# Altium PCB main-module-60mmPIC.PcbDoc (part 1 of 2)
Units mm, origin at the board's own origin, x right, y up, seen from the top; angles counter-clockwise.
Board outline 60 x 60 mm, 2 copper layers (Top Layer, Bottom Layer), stack 1.591 mm thick; 103 components, 103 nets, 469 pads, 239 vias.
Unrouted connection lines stored in the file: 40.
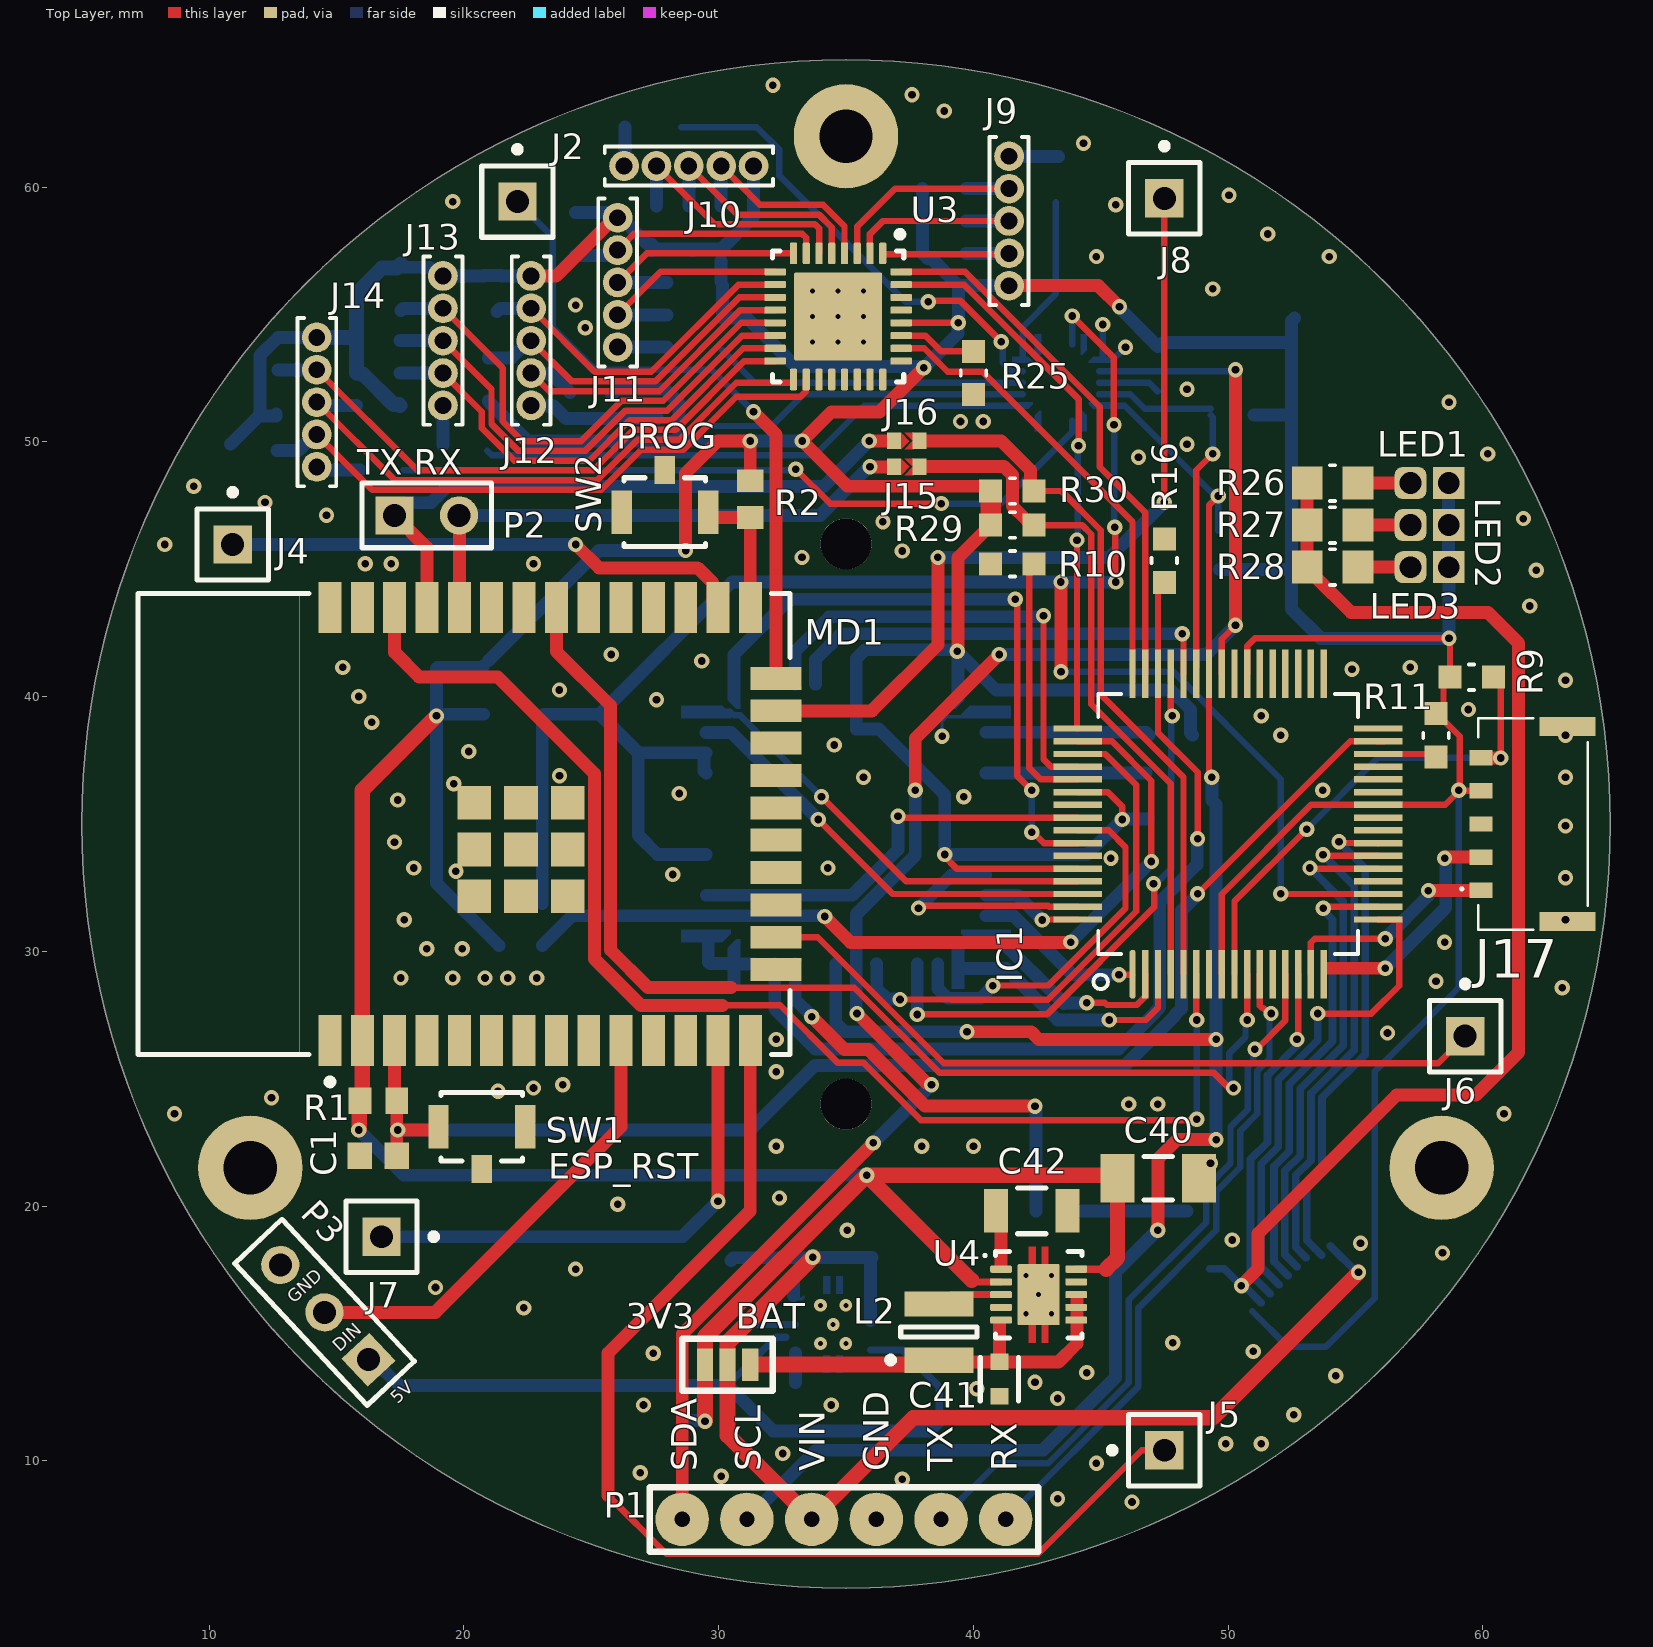
[diagram p0: Top Layer view]
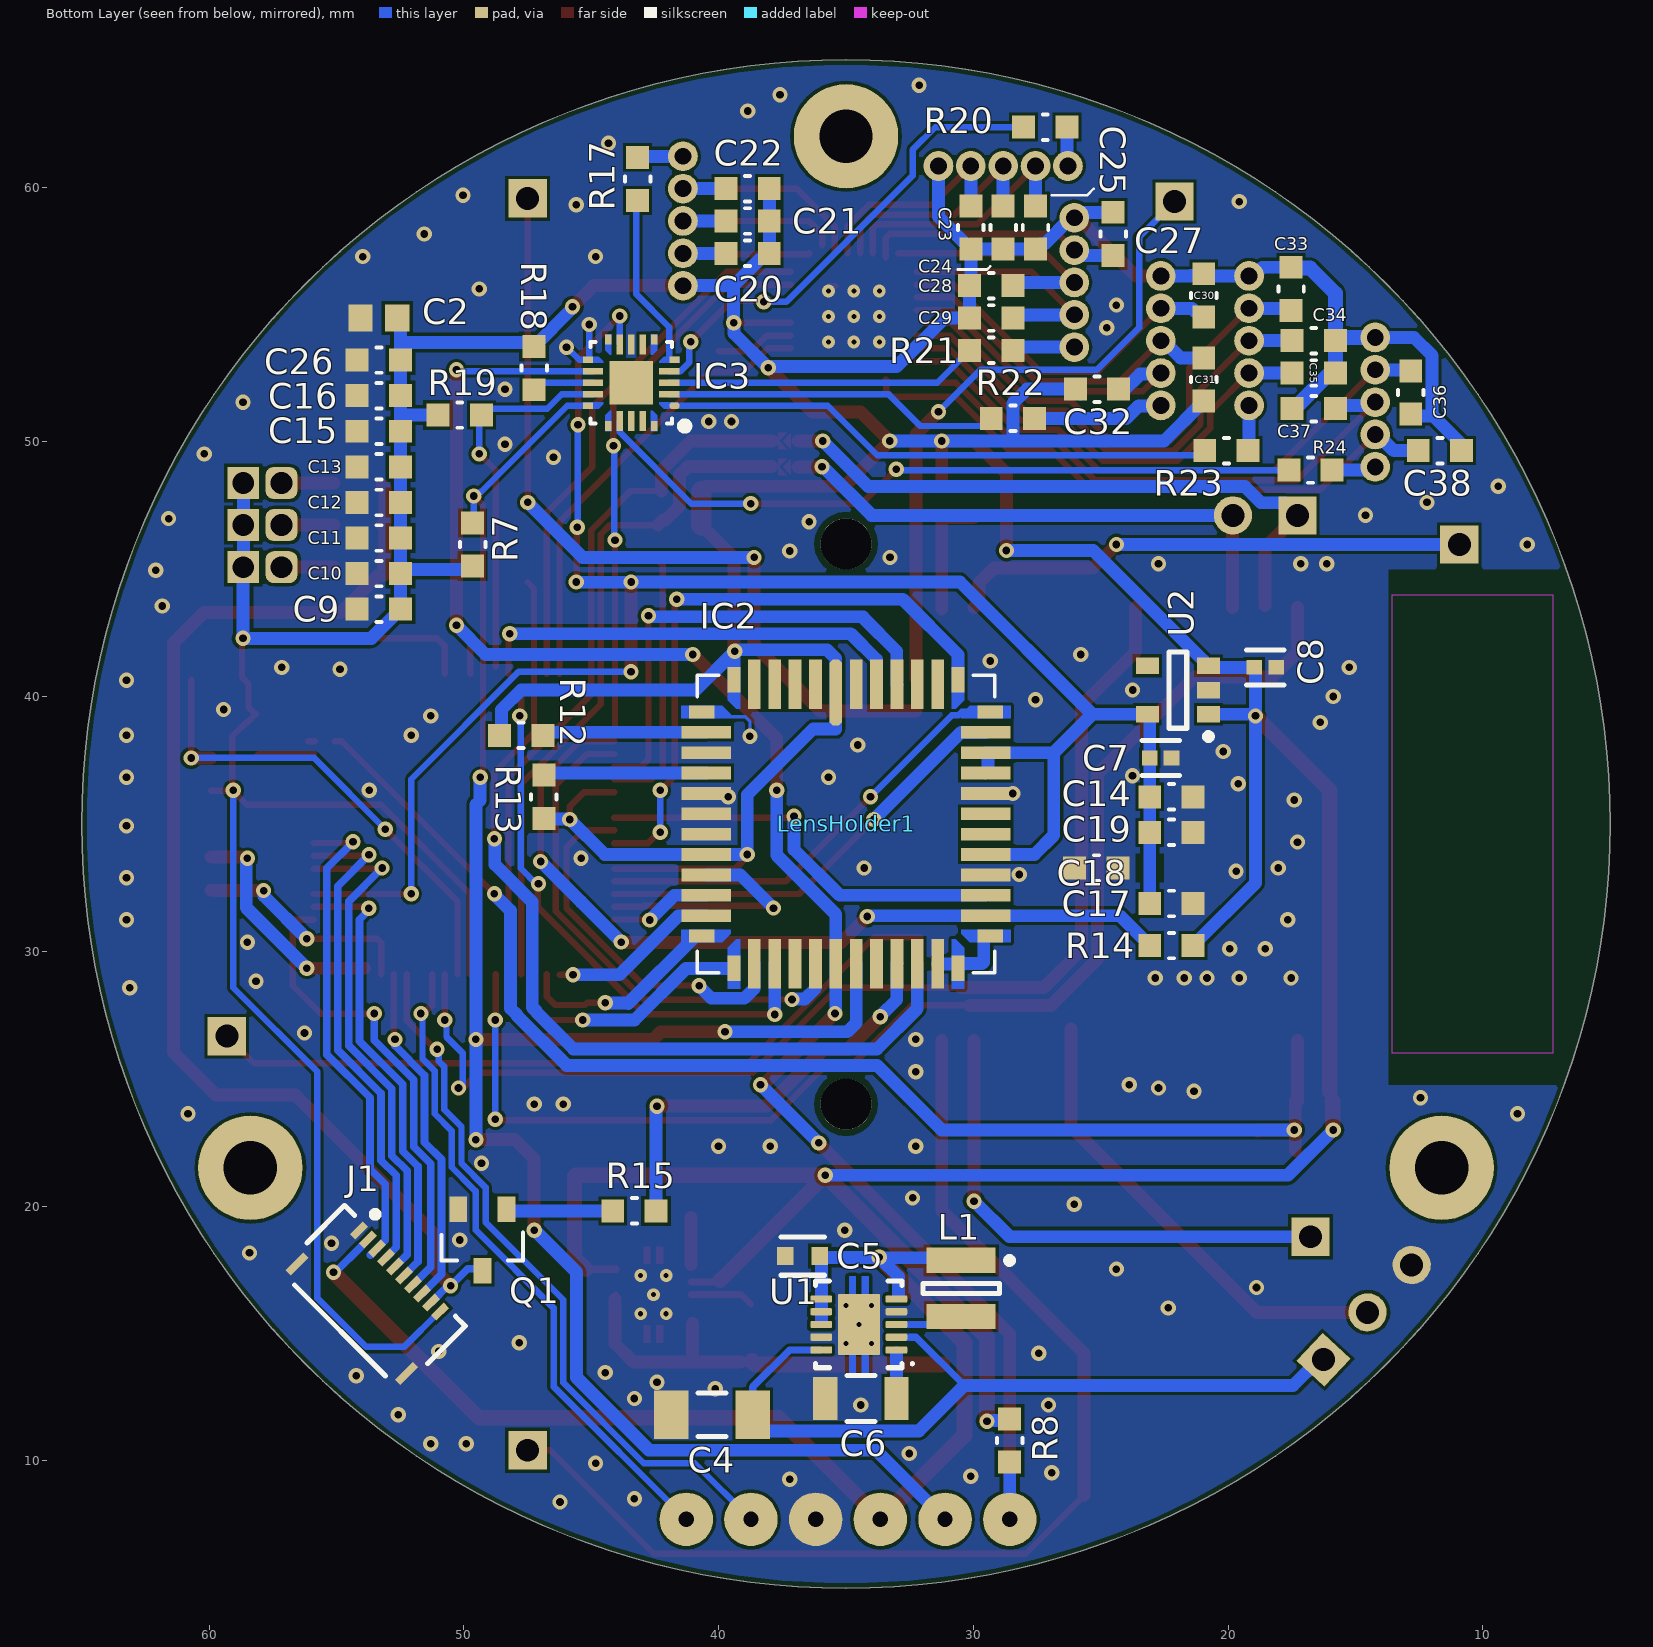
[diagram p1: Bottom Layer view, seen from below]

## Layer stack, top to bottom
Top Solder: solder mask 0.0102, Solder Resist, Dk 3.5
Top Layer: signal copper 0.0356
Dielectric 1: dielectric 1.52, FR-4, Dk 4.8
Bottom Layer: signal copper 0.0356
Bottom Solder: solder mask 0.0102, Solder Resist, Dk 3.5

## Board outline
35,5 cw(c35,35) 5,35 cw(c35,35) 35,65 cw(c35,35) 65,35 cw(c35,35)

## Design rules (kind name [scope] priority, off if disabled: settings)
BoardOutlineClearance [All] p1: gap=0.2 ignorepadtopadclearanceinfootprint=FALSE
Clearance [All] p1: gap=0.127 ignorepadtopadclearanceinfootprint=FALSE except(0.25: Arc-Hole Track-Hole SMDPad-Hole THPad-Hole Via-Hole Fill-Hole Poly-Hole Region-Hole Text-Hole)
ComponentClearance [All] p1: gap=0.127 collisioncheckmode=3 verticalgap=0.127 showdistances=TRUE
DiffPairsRouting [All] p1: maxlimit=0.254 minlimit=0.127 mostfreqgap=0.127 toplayer_minwidth=0.127 toplayer_maxwidth=25.4 toplayer_prefwidth=0.127 bottomlayer_minwidth=0.127 bottomlayer_maxwidth=25.4 bottomlayer_prefwidth=0.127 maxuncoupledlength=12.7
Height [All] p1: minheight=0 maxheight=1816.048 prefheight=12.7
HoleSize [All] p1: absolutevalues=TRUE maxlimit=6.3 minlimit=0.3 maxpercent=80.000 minpercent=20.000
HoleToHoleClearance [All] p1: gap=0.25 allowstackedmicrovias=FALSE
MinimumAnnularRing [All] p1: minimumring=0.076
MinimumSolderMaskSliver [All] p1: minsoldermaskwidth=0
PlaneClearance [All] p1: clearance=0.127
PlaneConnect PlaneConnectPowerPads [InPadClass('PowerPads')] p1: planeconnectstyle=Direct reliefexpansion=0.508 reliefentries=4 reliefconductorwidth=0.254 reliefairgap=0.254
PlaneConnect [All] p2: planeconnectstyle=Direct reliefexpansion=0.3 reliefentries=4 reliefconductorwidth=0.127 reliefairgap=0.127
PolygonConnect PolygonConnectPowerPads [All vs (InPadClass('PowerPads'))] p1: connectstyle=Direct reliefconductorwidth=0.254 reliefentries=4 polygonreliefangle="90 Angle" airgapwidth=0.254
PolygonConnect [All] p2: connectstyle=Direct reliefconductorwidth=0.254 reliefentries=4 polygonreliefangle="90 Angle" airgapwidth=0.127
RoutingVias [All] p1: holewidth=0.3 width=0.6 viastyle="Through Hole" minholewidth=0.3 minwidth=0.6 maxholewidth=0.6 maxwidth=6.6
RoutingVias RoutingVias_1 [All] p2: holewidth=0.3 width=0.6 viastyle="Through Hole" minholewidth=0.3 minwidth=1.27 maxholewidth=0.711 maxwidth=1.27
SilkToSilkClearance [All] p1: silktosilkclearance=0
SilkToSolderMaskClearance [IsPad] p1: minsilkscreentomaskgap=0.127 clearancetoexposedcopper=TRUE
SolderMaskExpansion [All] p1: expansion=0.075 istentingtop=FALSE
Width [All] p1: maxlimit=25.4 minlimit=0.127 preferedwidth=0.127 minimp=50.000000 maximp=50.000000 favimp=50.000000
20 further rules are at their usual default settings.

## Classes and differential pairs
net class PIXEL_D[0..7]: PIXEL_D0 PIXEL_D1 PIXEL_D2 PIXEL_D3 PIXEL_D4 PIXEL_D5 PIXEL_D6 PIXEL_D7
component class "U_main UI": C19 C20 C21 C22 C23 C24 C25 C26 C27 C28 C29 C30 C31 C32 C33 C34 C35 C36 C37 C38 C? IC3 IC? J9 J10 J11 J12 J13 J14 LED? R17 R18 R19 R20 R21 R22 R23 R24 R25 R? U3
component class interconnect: J1 J15 J16 P1 R29 R30
component class power: BAT C4 C5 C6 C7 C8 C40 C41 C42 L1 L2 RG1 RG2 U1 U2 U4
component class U_optics: C15 C16 C17 C18 IC2 LED1 LED2 LED3 Q1 R12 R13 R14 R15 R16 R26 R27 R28
component class MCU: C9 C10 C11 C12 C13 C14 IC1 J17 R7 R8 R9 R10 R11
component class ESP32: C1 C2 J2 J4 J5 J6 J8 MD1 P2 P3 R1 R2 RG1 RG2 SW1 SW2

## Components (designator, comment, footprint, x,y, rotation, side; value= is the part's Value field where it differs from the comment)
BAT "SJUMPER3POS" SJUMPER3POS-Footprint-1 30.353,13.774 r0 top (schematic designator SJ1)
C1 "GRM1885C1H101JA01D" CAPC1608X90X35ML10T15 16.637,21.971 r0 top
C2 "GRM1885C1H101JA01D" CAPC1608X90X35ML10T15 53.34,54.864 r180 bottom
C4 "CAP 22uF 6.3V 1206(3216)" CAPC1206(3216)190_M 40.259,11.811 r180 bottom value=22uF
C5 "GRM188R60J106ME47D" FP-GRM188-0_1-e0_2_0_55-MFG 36.703,18.034 r0 bottom
C6 "C1206C104K1RACTU" FP-C1206C-EB-MFG 34.417,12.446 r0 bottom value="0.10 £gF"
C7 "GRM155R60J475ME47D" FP-GRM155-0_1-IPC_B 22.65,37.592 r180 bottom
C8 "GRM155R60J475ME47D" FP-GRM155-0_1-IPC_B 18.542,41.148 r180 bottom
C9 "0.1uF" 1608[0603]_M 53.34,43.434 r180 bottom
C10 "0.1uF" 1608[0603]_M 53.34,44.831 r180 bottom
C11 "0.1uF" 1608[0603]_M 53.34,46.228 r180 bottom
C12 "0.1uF" 1608[0603]_M 53.34,47.625 r180 bottom
C13 "0.1uF" 1608[0603]_M 53.34,49.022 r180 bottom
C14 "0.1uF" 1608[0603]_M 22.225,36.068 r0 bottom
C15 "0.1uF" 1608[0603]_M 53.34,50.419 r180 bottom
C16 "0.1uF" 1608[0603]_M 53.34,51.816 r180 bottom
C17 "0.1uF" 1608[0603]_M 22.225,31.877 r0 bottom
C18 "0.1uF" 1608[0603]_M 25.173,33.274 r0 bottom
C19 "0.1uF" 1608[0603]_M 22.225,34.671 r0 bottom
C20 "10nF" 1608[0603]_M 38.862,57.404 r180 bottom
C21 "10nF" 1608[0603]_M 38.862,58.674 r180 bottom
C22 "10nF" 1608[0603]_M 38.862,59.944 r180 bottom
C23 "10nF" 1608[0603]_M 30.099,58.42 r270 bottom
C24 "10nF" 1608[0603]_M 28.829,58.42 r270 bottom
C25 "10nF" 1608[0603]_M 27.559,58.42 r270 bottom
C26 "0.1uF" 1608[0603]_M 53.34,53.213 r180 bottom
C27 "10nF" 1608[0603]_M 24.511,58.166 r90 bottom
C28 "10nF" 1608[0603]_M 29.299,56.134 r0 bottom
C29 "10nF" 1608[0603]_M 29.299,54.864 r0 bottom
C30 "10nF" 1608[0603]_M 20.955,55.753 r90 bottom
C31 "10nF" 1608[0603]_M 20.955,52.451 r270 bottom
C32 "10nF" 1608[0603]_M 25.146,52.07 r0 bottom
C33 "10nF" 1608[0603]_M 17.526,56.007 r90 bottom
C34 "10nF" 1608[0603]_M 16.637,53.975 r180 bottom
C35 "10nF" 1608[0603]_M 16.637,52.705 r180 bottom
C36 "10nF" 1608[0603]_M 12.827,51.943 r270 bottom
C37 "10nF" 1608[0603]_M 16.637,51.308 r0 bottom
C38 "10nF" 1608[0603]_M 11.684,49.657 r180 bottom
C40 "CAP 22uF 6.3V 1206(3216)" CAPC1206(3216)190_M 47.261,21.093 r180 top value=22uF
C41 "GRM188R60J106ME47D" FP-GRM188-0_1-e0_2_0_55-MFG 41.021,13.208 r270 top
C42 "C1206C104K1RACTU" FP-C1206C-EB-MFG 42.291,19.812 r0 top value="0.10 £gF"
IC1 "PIC32MZ1024ECG064" TQFP-64_M 50,35 r90 top locked
IC2 "MT9V034C12STM" CLCC-48_m 35,35 r180 bottom locked
IC3 "AT42QT1070-MMH" VQFN-20-EXPOSED-PAD_M 43.434,52.324 r180 bottom
J1 "503480-1000" MOLX-503480-1000 53.467,16.51 r225 bottom
J2 "Socket" PIN1 22.098,59.436 r0 top
J4 "Socket" PIN1 10.922,45.974 r0 top
J5 "Socket" PIN1 47.498,10.414 r90 top
J6 "Socket" PIN1 59.309,26.67 r0 top
J7 "Socket" PIN1 16.764,18.796 r270 top
J8 "Socket" PIN1 47.498,59.563 r0 top
J9 "GRPB051VWVN-RC" CONN5_1VWVN-RC_SUL 41.402,61.214 r270 top
J10 "GRPB051VWVN-RC" CONN5_1VWVN-RC_SUL 26.289,60.833 r0 top
J11 "GRPB051VWVN-RC" CONN5_1VWVN-RC_SUL 26.035,53.721 r90 top
J12 "GRPB051VWVN-RC" CONN5_1VWVN-RC_SUL 22.639,51.435 r90 top
J13 "GRPB051VWVN-RC" CONN5_1VWVN-RC_SUL 19.177,51.435 r90 top
J14 "GRPB051VWVN-RC" CONN5_1VWVN-RC_SUL 14.224,49.022 r90 top
J15 "JUMPER" JUMPER 37.338,49.022 r270 top
J16 "JUMPER" JUMPER 37.338,50.038 r270 top
J17 "BM05B-ADHKS-GAN-ETB" BM05BADHKSGANETB 61.976,35 r90 top
L1 "SRN3015-4R7M" BOUR-SRN3015-2_V 30.48,16.764 r270 bottom
L2 "SRN3015-4R7M" BOUR-SRN3015-2_V 38.65,15.055 r90 top
LED1 "Unpopulated" CABLE-TERMINAL1x2 57.912,48.387 r180 top
LED2 "Unpopulated" CABLE-TERMINAL1x2 57.912,46.736 r180 top
LED3 "Unpopulated" CABLE-TERMINAL1x2 57.912,45.085 r180 top
LensHolder1 "Unpopulated" BOARDLENSMOUNT_M12_22MM 35,35 r90 bottom locked
MD1 "ESP32-WROOM-32" FP-ESP32-WROOM-32-MFG 20,35 r90 top locked
P1 "811-S1-006-30-015101" "New footprint 1" 34.92,7.7 r0 top
P2 "Header 2" HDR1X2 17.272,47.117 r0 top
P3 "LED_strip" HDR1X3 16.256,13.97 r133 top
Q1 "BSS138BK" SOT23-3_N 49.276,18.669 r270 bottom
R1 "ERJ-3EKF1001V" RESC1608X55X30ML15T15 16.637,24.13 r180 top
R2 "ERJ-3EKF1001V" RESC1608X55X30ML15T15 31.242,47.752 r90 top
R7 "1K5" 1608[0603]_M 49.657,45.974 r270 bottom
R8 "1K5" 1608[0603]_M 28.575,10.795 r90 bottom
R9 "10K" 1608[0603]_M 59.563,40.767 r180 top
R10 "Unpopulated" 1608[0603]_M 41.529,45.212 r0 top
R11 "10K" 1608[0603]_M 58.166,38.481 r90 top
R12 "1K" 1608[0603]_M 47.752,38.481 r0 bottom
R13 "1K" 1608[0603]_M 46.863,36.068 r270 bottom
R14 "10K" 1608[0603]_M 22.225,30.226 r180 bottom
R15 "330" 1608[0603]_M 43.307,19.812 r0 bottom
R16 "10K" 1608[0603]_M 47.498,45.339 r270 top
R17 "4K7" 1608[0603]_M 43.18,60.325 r270 bottom
R18 "47K" 1608[0603]_M 47.244,52.899 r90 bottom
R19 "47K" 1608[0603]_M 50.165,51.054 r0 bottom
R20 "4K7" 1608[0603]_M 27.178,62.357 r0 bottom
R21 "4K7" 1608[0603]_M 29.299,53.594 r0 bottom
R22 "4K7" 1608[0603]_M 28.448,50.927 r0 bottom
R23 "4K7" 1608[0603]_M 20.066,49.657 r0 bottom
R24 "4K7" 1608[0603]_M 16.764,48.895 r0 bottom
R25 "4K99" 1608[0603]_M 40.005,52.705 r90 top
R26 "26R1, 0.1%, 1/8W" 2012[0805]_M 54.102,48.387 r0 top
R27 "26R1, 0.1%, 1/8W" 2012[0805]_M 54.102,46.736 r0 top
R28 "26R1, 0.1%, 1/8W" 2012[0805]_M 54.102,45.085 r0 top
R29 "10K" 1608[0603]_M 41.529,46.736 r180 top
R30 "10K" 1608[0603]_M 41.529,48.075 r180 top
SW1 "B3U-1100P" FP-B3U-1100P-MFG 20.701,23.114 r0 top
SW2 "B3U-1100P" FP-B3U-1100P-MFG 27.891,47.244 r180 top
U1 "TPS61202DRCT" DRC0010J_V 34.495,15.351 r0 bottom
U2 "LP2980AIM5-3.3/NOPB" MF05A_L 21.971,40.259 r0 bottom
U3 "TLC5947RHBT" RHB0032E_V 34.691,54.926 r270 top
U4 "TPS61201DRCT" DRC0010J_V 42.562,16.521 r0 top

## Footprints (in the part's own frame and the unit in brackets; to place one, negate y for a bottom-side part, rotate by r counter-clockwise, add the part's x,y. Pads: shape width x height; smd on the part's side, far side on the other; paste and mask are expansions set on the pad)
1608[0603]_M [mm] "Two Terminal Package, Body 1.6x0.8mm, IPC Low Density"
  rect 0.9x0.9 smd: 1(-0.85,0) 2(0.85,0)
  silkscreen extent -0.1,-0.5 0.1,0.5, body extent -0.8,-0.4 0.8,0.4, height 0.85
2012[0805]_M [mm] "Two Terminal Package, Body 2x1.2mm, IPC Low Density"
  rect 1.2x1.3 smd: 1(-1,0) 2(1,0)
  silkscreen extent -0.1,-0.7 0.1,0.7, body extent -1,-0.6 1,0.6, height 1.3
BM05BADHKSGANETB [mm]
  rect 0.6x0.9 smd: 1(-2.6,2.05) 2(-1.3,2.05) 3(0,2.05) 4(1.3,2.05) 5(2.6,2.05)
  rect 0.75x2.2 smd: MP1(-3.825,-1.35) MP2(3.825,-1.35)
  silkscreen extent -4.15,-2.15 4.15,2.85, body extent -4.15,-2.37 4.15,2.44, height 2
BOARDLENSMOUNT_M12_22MM [mm] "M12 (S-Mount) board lens mount base, 22mm hole distance, 16mm height"
  round 2 hole 2 unplated: 0(-11,0) 1(11,0)
  body extent -13.25,-10.5 13.25,10.5, height 16
BOUR-SRN3015-2_V [mm] "SMD, 2-Leads, Body 3x3mm, Height 1.5mm"
  rect 1x2.7 smd: 1(-1.1,0) 2(1.1,0)
  silkscreen extent -1.22,-1.5 0.2,2.02, body extent -1.5,-1.5 1.5,1.5, height 1.5
CABLE-TERMINAL1x2 [mm] "Cable to board terminal, 1x2, 1.5mm pitch"
  rect 1.25x1.25 hole 0.85 mask+0.075: 1(-0.75,0)
  rrect50% 1.25x1.25 hole 0.85 mask+0.075: 2(0.75,0)
CAPC1206(3216)190_M [mm] "Chip Capacitor, Body 3.2x1.6mm, Height 1.9mm, IPC Low Density"
  rect 1.35x1.9 smd: 1(-1.6,0) 2(1.6,0)
  silkscreen extent -0.55,-0.85 0.55,0.85, body extent -1.7,-0.9 1.7,0.9, height 1.9
CAPC1608X90X35ML10T15 [mm] "Chip Capacitor, 2-Leads, Body 1.60x0.80mm, IPC Low Density"
  rect 0.95x1.05 smd: 1(-0.725,0) 2(0.725,0)
  body extent -0.85,-0.45 0.85,0.45, height 0.9
CLCC-48_m [mm] "CLCC, 48-Leads, Body 11.43x11.43x2.3mm, Pitch 0.8mm, IPC Low Density"
  oct 0.5x2.6 smd paste-0.025 mask+0.075: 1(-0.4,5.165)
  rect 0.5x1.95 smd paste-0.025 mask+0.075: 2(-1.2,5.49) 3(-2,5.49) 4(-2.8,5.49) 5(-3.6,5.49) 20(-3.6,-5.49) 21(-2.8,-5.49) 22(-2,-5.49) 23(-1.2,-5.49) 24(-0.4,-5.49) 25(0.4,-5.49) 26(1.2,-5.49) 27(2,-5.49) 28(2.8,-5.49) 29(3.6,-5.49) 44(3.6,5.49) 45(2.8,5.49) 46(2,5.49) 47(1.2,5.49) 48(0.4,5.49)
  rect 0.5x1 smd paste-0.025 mask+0.075: 6(-4.4,5.665) 19(-4.4,-5.665) 30(4.4,-5.665) 43(4.4,5.665)
  rect 1x0.5 smd paste-0.025 mask+0.075: 7(-5.665,4.4) 18(-5.665,-4.4) 31(5.665,-4.4) 42(5.665,4.4)
  rect 1.95x0.5 smd paste-0.025 mask+0.075: 8(-5.49,3.6) 9(-5.49,2.8) 10(-5.49,2) 11(-5.49,1.2) 12(-5.49,0.4) 13(-5.49,-0.4) 14(-5.49,-1.2) 15(-5.49,-2) 16(-5.49,-2.8) 17(-5.49,-3.6) 32(5.49,-3.6) 33(5.49,-2.8) 34(5.49,-2) 35(5.49,-1.2) 36(5.49,-0.4) 37(5.49,0.4) 38(5.49,1.2) 39(5.49,2) 40(5.49,2.8) 41(5.49,3.6)
  Top Layer region: 4.15,6.465 4.15,4.515 4.3,4.515 4.65,4.865 4.65,6.465
  Top Layer region: 6.465,4.155 4.515,4.15 4.515,4.3 4.865,4.65 6.465,4.65
  Top Layer region: 6.465,-4.15 4.515,-4.15 4.515,-4.3 4.865,-4.65 6.465,-4.65
  Top Layer region: 4.155,-6.465 4.15,-4.515 4.3,-4.515 4.65,-4.865 4.65,-6.465
  Top Layer region: -4.15,-6.465 -4.15,-4.515 -4.3,-4.515 -4.65,-4.865 -4.65,-6.465
  Top Layer region: -6.465,-4.155 -4.515,-4.15 -4.515,-4.3 -4.865,-4.65 -6.465,-4.65
  Top Layer region: -4.155,6.465 -4.15,4.515 -4.3,4.515 -4.65,4.865 -4.65,6.465
  Top Layer region: -6.465,4.15 -4.515,4.15 -4.515,4.3 -4.865,4.65 -6.465,4.65
  silkscreen extent -5.84,-5.84 5.84,5.84, body extent -5.72,-5.72 5.72,5.72, height 2.3
CONN5_1VWVN-RC_SUL [mil]
  round 46 hole 26 mask+0: 1(0,0) 2(50,0) 3(100,0) 4(150,0) 5(200,0)
  silkscreen extent -30,-30 230,30, body extent 0,0 10,10, height 10
DRC0010J_V [mm] "SON, 10-Leads, Body 3x3mm, Pitch 0.5mm, Thermal Pad 2.4x1.65mm, TI Recommended"
  rrect36% 0.85x0.28 smd paste-0.025 mask+0.07: 1(-1.475,1) 2(-1.475,0.5) 3(-1.475,0) 4(-1.475,-0.5) 5(-1.475,-1) 6(1.475,-1) 7(1.475,-0.5) 8(1.475,0) 9(1.475,0.5) 10(1.475,1)
  rrect6% 1.65x2.4 smd paste-0.825 mask+0.07: 11(0,0)
  Top Layer region: -0.39,-1.2 -0.11,-1.2 -0.11,-1.9 -0.39,-1.9
  Top Layer region: 0.39,-1.9 0.11,-1.9 0.11,-1.2 0.39,-1.2
  Top Layer region: 0.39,1.2 0.11,1.2 0.11,1.9 0.39,1.9
  Top Layer region: -0.39,1.9 -0.11,1.9 -0.11,1.2 -0.39,1.2
  silkscreen extent -2.15,-1.7 1.7,1.7, body extent -1.55,-1.55 1.55,1.55, height 1
FP-B3U-1100P-MFG [mm]
  rect 0.8x1.7 smd paste+0 mask+0: 1(1.7,0) 2(-1.7,0)
  rect 0.8x1.1 smd paste+0 mask+0: 3(0,-1.65)
  silkscreen extent -1.6,-1.35 1.6,1.35, body extent -2.2,-2.3 2.2,1.45, height 0.25
FP-C1206C-EB-MFG [mm]
  rect 0.95x1.7 smd paste+0 mask+0: 1(-1.4,0) 2(1.4,0)
  silkscreen extent -0.55,-0.9 0.55,0.9, body extent -1.6,-0.8 1.6,0.8, height 0.88
FP-ESP32-WROOM-32-MFG [mm]
  rect 2x0.9 smd paste+0 mask+0: 1(-8.5,5.26) 2(-8.5,3.99) 3(-8.5,2.72) 4(-8.5,1.45) 5(-8.5,0.18) 6(-8.5,-1.09) 7(-8.5,-2.36) 8(-8.5,-3.63) 9(-8.5,-4.9) 10(-8.5,-6.17) 11(-8.5,-7.44) 12(-8.5,-8.71) 13(-8.5,-9.98) 14(-8.5,-11.25) 25(8.5,-11.25) 26(8.5,-9.98) 27(8.5,-8.71) 28(8.5,-7.44) 29(8.5,-6.17) 30(8.5,-4.9) 31(8.5,-3.63) 32(8.5,-2.36) 33(8.5,-1.09) 34(8.5,0.18) 35(8.5,1.45) 36(8.5,2.72) 37(8.5,3.99) 38(8.5,5.26)
  rect 0.9x2 smd paste+0 mask+0: 15(-5.715,-12.25) 16(-4.445,-12.25) 17(-3.175,-12.25) 18(-1.905,-12.25) 19(-0.635,-12.25) 20(0.635,-12.25) 21(1.905,-12.25) 22(3.175,-12.25) 23(4.445,-12.25) 24(5.715,-12.25)
  rect 1.33x1.33 smd paste+0 mask+0: 39(0.835,-4.075) 39_1(-1,-4.075) 39_2(-2.835,-4.075) 39_3(0.835,-2.24) 39_4(-1,-2.24) 39_5(-2.835,-2.24) 39_6(0.835,-0.405) 39_7(-1,-0.405) 39_8(-2.835,-0.405)
  Keep-Out Layer region: -9,6.45 9,6.45 9,12.75 -9,12.75
  Keep-Out Layer region: -9,6.45 9,6.45 9,12.75 -9,12.75
  silkscreen extent -10.25,-12.8 9.05,12.8, body extent -9.6,-13.35 9.6,12.9, height 0.25
FP-GRM155-0_1-IPC_B [mm]
  rect 0.615x0.572 smd paste+0 mask+0: 1(-0.429,0) 2(0.429,0)
  silkscreen extent -0.74,-0.69 0.74,0.69, body extent -0.5,-0.25 0.5,0.25, height 0.6
FP-GRM188-0_1-e0_2_0_55-MFG [mm]
  rect 0.65x0.7 smd paste+0 mask+0: 1(-0.675,0) 2(0.675,0)
  silkscreen extent -0.85,-0.75 0.85,0.75, body extent -0.8,-0.4 0.8,0.4, height 0.9
HDR1X2 [mm] "Connector; Header; 2 Position"
  rect 1.5x1.5 hole 0.9: 1(0,0)
  round 1.5 hole 0.9: 2(2.54,0)
  silkscreen extent -1.27,-1.27 3.81,1.27
HDR1X3 [mm] "Connector; Header; 3 Position"
  rect 1.5x1.5 hole 0.9: 1(0,0)
  round 1.5 hole 0.9: 2(2.54,0) 3(5.08,0)
  silkscreen extent -1.27,-1.27 6.35,1.27
JUMPER [mm]
  rect 0.65x0.55 smd paste-2.54 mask-2.54: 1(0,-0.45) 2(0,0.55)
  Top Layer region: -0.325,-0.041 0,0.284 0.325,-0.041 0.325,0.318 -0.325,0.317
  Top Layer region: -0.325,-0.175 0.003,0.152 0.325,-0.175
MF05A_L [mm] "SOT23, 5-Leads, Body 2.9x1.6mm, Pitch 0.95mm, Lead Span 2.8mm, IPC High Density"
  rect 0.9x0.65 smd: 1(-1.2,0.95) 2(-1.2,0) 3(-1.2,-0.95) 4(1.2,-0.95) 5(1.2,0.95)
  silkscreen extent -1.32,-1.5 0.35,1.95, body extent -0.83,-1.49 0.83,1.5, height 1.19
MOLX-503480-1000 [mm] "FPC Connector, 10-Leads, Right Angle, Pitch 0.5 mm, Mated Height 1.0 mm, SMT"
  rect 0.3x0.7 smd: 1(-2.25,1.325) 2(-1.75,1.325) 3(-1.25,1.325) 4(-0.75,1.325) 5(-0.25,1.325) 6(0.25,1.325) 7(0.75,1.325) 8(1.25,1.325) 9(1.75,1.325) 10(2.25,1.325)
  rect 0.3x1 smd: MP1(-3.04,-1.325) MP2(3.04,-1.325)
  silkscreen extent -3.35,-1.98 3.35,2.35, body extent -3.35,-1.98 3.35,1.62, height 1.91
"New footprint 1" [mm]
  round 2.1 hole 0.6: 1(-6.35,0) 2(-3.81,0) 3(-1.27,0) 4(1.27,0) 5(3.81,0) 6(6.35,0)
  silkscreen extent -7.62,-1.27 7.62,1.27
PIN1 [mm] "Connector; Plug"
  rect 1.5x1.5 hole 0.9: 1(0,0)
  silkscreen extent -1.4,-1.4 1.4,2.17
RESC1608X55X30ML15T15 [mm] "Chip Resistor, 2-Leads, Body 1.60x0.80mm, IPC Low Density"
  rect 0.9x1.05 smd: 1(-0.725,0) 2(0.725,0)
  body extent -0.87,-0.48 0.87,0.48, height 0.55
RHB0032E_V [mm] "QFN, 32-Leads, Body 5x5mm, Pitch 0.5mm, Thermal Pad 3.45x3.45mm"
  rrect36% 0.85x0.28 smd: 1(-2.475,1.75) 2(-2.475,1.25) 3(-2.475,0.75) 4(-2.475,0.25) 5(-2.475,-0.25) 6(-2.475,-0.75) 7(-2.475,-1.25) 8(-2.475,-1.75) 17(2.475,-1.75) 18(2.475,-1.25) 19(2.475,-0.75) 20(2.475,-0.25) 21(2.475,0.25) 22(2.475,0.75) 23(2.475,1.25) 24(2.475,1.75)
  rrect36% 0.28x0.85 smd: 9(-1.75,-2.475) 10(-1.25,-2.475) 11(-0.75,-2.475) 12(-0.25,-2.475) 13(0.25,-2.475) 14(0.75,-2.475) 15(1.25,-2.475) 16(1.75,-2.475) 25(1.75,2.475) 26(1.25,2.475) 27(0.75,2.475) 28(0.25,2.475) 29(-0.25,2.475) 30(-0.75,2.475) 31(-1.25,2.475) 32(-1.75,2.475)
  rrect3% 3.45x3.45 smd: 33(0,0)
  silkscreen extent -3.35,-2.58 2.58,2.57, body extent -2.5,-2.5 2.5,2.5, height 1
SJUMPER3POS-Footprint-1 [mil]
  rect 25x50 smd: 1(-35,0) 2(0,0) 3(35,0)
  silkscreen extent -70,-40 70,40
SOT23-3_N [mm] "SOT23, 3-Leads, Body 1.4x3mm, Lead Span 2.6mm, IPC Medium Density"
  rect 1x0.7 smd: 1(-1.2,0.95) 2(-1.2,-0.95) 3(1.2,0)
  silkscreen extent -0.3,-1.6 0.8,1.6, body extent -0.7,-1.5 0.7,1.5, height 1.1
TQFP-64_M [mm] "TQFP, 44-Leads, Body 10x10x1.2mm, Pitch 0.5mm, Lead Span 12mm, IPC Low Density"
  oct 1.9x0.25 smd paste-0.025 mask+0.075: 1(-5.9,3.75)
  rect 1.9x0.25 smd paste-0.025 mask+0.075: 2(-5.9,3.25) 3(-5.9,2.75) 4(-5.9,2.25) 5(-5.9,1.75) 6(-5.9,1.25) 7(-5.9,0.75) 8(-5.9,0.25) 9(-5.9,-0.25) 10(-5.9,-0.75) 11(-5.9,-1.25) 12(-5.9,-1.75) 13(-5.9,-2.25) 14(-5.9,-2.75) 15(-5.9,-3.25) 16(-5.9,-3.75) 33(5.9,-3.75) 34(5.9,-3.25) 35(5.9,-2.75) 36(5.9,-2.25) 37(5.9,-1.75) 38(5.9,-1.25) 39(5.9,-0.75) 40(5.9,-0.25) 41(5.9,0.25) 42(5.9,0.75) 43(5.9,1.25) 44(5.9,1.75) 45(5.9,2.25) 46(5.9,2.75) 47(5.9,3.25) 48(5.9,3.75)
  rect 0.25x1.9 smd paste-0.025 mask+0.075: 17(-3.75,-5.9) 18(-3.25,-5.9) 19(-2.75,-5.9) 20(-2.25,-5.9) 21(-1.75,-5.9) 22(-1.25,-5.9) 23(-0.75,-5.9) 24(-0.25,-5.9) 25(0.25,-5.9) 26(0.75,-5.9) 27(1.25,-5.9) 28(1.75,-5.9) 29(2.25,-5.9) 30(2.75,-5.9) 31(3.25,-5.9) 32(3.75,-5.9) 49(3.75,5.9) 50(3.25,5.9) 51(2.75,5.9) 52(2.25,5.9) 53(1.75,5.9) 54(1.25,5.9) 55(0.75,5.9) 56(0.25,5.9) 57(-0.25,5.9) 58(-0.75,5.9) 59(-1.25,5.9) 60(-1.75,5.9) 61(-2.25,5.9) 62(-2.75,5.9) 63(-3.25,5.9) 64(-3.75,5.9)
  silkscreen extent -6.48,-5.1 5.1,5.28, body extent -5,-5 5,5, height 1.2
VQFN-20-EXPOSED-PAD_M [mm] "VQFN, 20-Leads, Body 3x3mm, Pitch 0.45mm, IPC Low Density"
  oct 0.4x0.25 smd paste-0.025 mask+0.05: 1(1.7,-0.9)
  rect 0.8x0.25 smd paste-0.025 mask+0.05: 2(1.5,-0.45) 3(1.5,0) 4(1.5,0.45) 12(-1.5,0.45) 13(-1.5,0) 14(-1.5,-0.45)
  rect 0.4x0.25 smd paste-0.85 mask+0.05: 5(1.7,0.9) 11(-1.7,0.9) 15(-1.7,-0.9)
  rect 0.25x0.4 smd paste-0.85 mask+0.05: 6(0.9,1.7) 10(-0.9,1.7) 16(-0.9,-1.7) 20(0.9,-1.7)
  rect 0.25x0.8 smd paste-0.025 mask+0.05: 7(0.45,1.5) 8(0,1.5) 9(-0.45,1.5) 17(-0.45,-1.5) 18(0,-1.5) 19(0.45,-1.5)
  rect 1.7x1.7 smd mask+0.05: EP(0,0)
  Top Layer region: -1.9,-0.775 -1.1,-0.775 -1.1,-0.85 -1.275,-1.025 -1.9,-1.025
  Top Layer region: -0.775,-1.9 -0.775,-1.1 -0.85,-1.1 -1.025,-1.275 -1.025,-1.9
  Top Layer region: 1.8,-0.775 1.1,-0.775 1.1,-0.85 1.275,-1.025 1.8,-1.025
  Top Layer region: 0.775,-1.9 0.775,-1.1 0.85,-1.1 1.025,-1.275 1.025,-1.9
  Top Layer region: 0.775,1.9 0.775,1.1 0.85,1.1 1.025,1.275 1.025,1.9
  Top Layer region: 1.9,0.775 1.1,0.775 1.1,0.85 1.275,1.025 1.9,1.025
  Top Layer region: -1.9,0.775 -1.1,0.775 -1.1,0.85 -1.275,1.025 -1.9,1.025
  Top Layer region: -0.775,1.9 -0.775,1.1 -0.85,1.1 -1.025,1.275 -1.025,1.9
  silkscreen extent -1.6,-1.85 2.25,1.6, body extent -1.55,-1.55 1.55,1.55, height 0.85

## Part data
BAT: library part CMP-001-0001-1, "3 pins solder jumper"
C1 C2: library part CMP-2006-02595-1, Manufacturer=Murata, Part Number=GRM1885C1H101JA01D
C4 C40: library part CMP-1037-04986-1, "CAP 22uF 6.3V ¡Ó20% 1206 (3216 Metric) Thickness 1.9mm SMD", Case-EIA=1206, Case-Metric=3216, Rated Voltage="6.3 V", Tolerance=A¡Ó20%, Max Thickness="1.9 mm", Technology=SMT
C5 C41: library part CMP-2006-02792-2, "Chip Multilayer Ceramic Capacitors for General Purpose, 0603, 10uF, X5R, 15%, 20%, 6.3V", Capacitance=10uF, Case Code (Imperial)=0603, Case Code (Metric)=1608, Dielectric=X5R, Max Operating Temperature=85¢XC, Min Operating Temperature=-55¢XC, Package Quantity=4000, Tolerance=20%, Voltage=6.3V, Case/Package=0603, Depth=0.8mm, Height=0.8mm, Lead Free="Lead Free", Length=1.6mm, Material=Ceramic, Mount="Surface Mount", Packaging="Tape and Reel", Radiation Hardening=No, REACH SVHC="No SVHC", Termination=SMD/SMT, Thickness=0.035inch, Voltage Rating=6.3V, Voltage Rating (DC)=6.3V, Width=0.031inch
C6 C42: library part CMP-03020-000153-1, "CAP CER 0.1UF 100V X7R 1206", Capacitance="0.10 £gF", Manufacturer=KEMET, Package=C1206C-EB, Temperature="-55¢XC to +150¢XC", Temperature Characteristic=X7R, Temperature Coefficient=15%, Temperature Range High=+150¢XC, Temperature Range Low=-55¢XC, Tolerance=0.1, Voltage Rating="100 V", Automotive=Yes, Automotive Grade="Grade 0", Category=Cap, ComponentLink2Description=Datasheet, ComponentLink2URL=https://content.kemet.com/datasheets/KEM_C1007_X8R_ULTRA_150C_SMD.pdf, Device Class L1="Passive Components", Device Class L2=Capacitors, Device Class L3="Ceramic Capacitors", Digikey Description="CAP CER 0.1UF 100V X7R 1206", Height=0.88mm, Ipc Land Pattern Name=CAPC320160X78, Lead Free=Yes, Manufacturer Part Number=C1206C104K1RACTU, Material=Ceramic, Mouser Description="CAP CER 0.1UF 100V X7R 1206", Octopart=https://octopart.com/c1206c104k1ractu-kemet-89521, RoHS=TRUE
C7 C8: library part CMP-2008-04549-2, "Chip Multilayer Ceramic Capacitors for General Purpose, 0402, 4.7uF, X5R, 15%, 20%, 6.3V", Capacitance=4.7uF, Case Code (Imperial)=0402, Case Code (Metric)=1005, Dielectric=X5R, Max Operating Temperature=85¢XC, Min Operating Temperature=-55¢XC, Package Quantity=10000, Tolerance=20%, Voltage=6.3V, Case/Package=0402, Contact Plating=Tin, Depth=0.5mm, Height=0.5mm, Lead Free="Lead Free", Length=1mm, Mount="Surface Mount", Packaging="Tape and Reel", REACH SVHC="No SVHC", Termination=SMD/SMT, Thickness=0.022inch, Voltage Rating=6.3V, Voltage Rating (DC)=6.3V, Weight=0.000212oz, Width=0.02inch
C9 C10 C11 C12 C13 C14 C15 C16 C17 C18 C19 C20 C21 C22 C23 C24 C25 C26 C27 C28 C29 C30 C31 C32 C33 C34 C35 C36 C37 C38: library part Capacitor, "Generic Capacitor"
IC1: library part CMP-042-000001-1, "32-bit Microcontroller", Design Item ID=PIC32MZ1024ECG064, Source=PIC.SchLib
IC2: library part CMP-025-000000-1, "1/3\" WVGA CMOS Image Sensor", Design Item ID=MT9V034C12STM, Source=ImageSensor.SchLib
IC3: library part AT42QT1070, "Seven-channel capacitive touch sensor (Comms mode)"
J1: library part CMP-1241-00115-1, "0.5 mm Pitch Easy-On(TM) BackFlip(TM) Type FPC Connector, 1.0 mm Mated Height, Right Angle, SMT, Dual Contact, 10 Circuits, -40 to 85 degC, ELV and RoHS Compliant, Tape and Reel", Current (Max per Contact)=0.5A, Manufacturer=Molex, Voltage (Max)="50V AC (RMS)/DC", Circuits (Loaded)=10, ComponentLink1Description="Manufacturer URL", ComponentLink1URL=http://www.molex.com/molex/index.jsp, ComponentLink2Description=Datasheet, ComponentLink2URL=http://www.molex.com/webdocs/datasheets/pdf/en-us/5034801000_FFC_FPC_CONNECTORS.pdf, ComponentLink3Description="Package Specification", ComponentLink3URL=http://www.molex.com/pdm_docs/sd/5034801000_sd.pdf, Contact Position=Dual, Durability (mating cycles max)=10, Entry Angle="90degrees Angle", Mated Height=1.00mm, Material - Metal="Phosphor Bronze", Material - Plating Mating=Gold, Material - Plating Termination="Gold, Tin", Mounting Technology="Surface Mount", Number of Rows=1, Orientation="Right Angle", PackageDescription="10-Lead FPC Connector, Pitch 0.5 mm", PackageReference=503480-1000, PackageVersion="Rev. F, 09/2012", Packing="Tape and Reel", PartNumber=503480-1000, PCB Locator=No, PCB Retention=Yes, Pitch - Mating Interface=0.50mm, Polarized to PCB=Yes, RoHS=TRUE, Stackable=No
J9 J10 J11 J12 J13 J14: "No Description Available", Mfr_Name=Sullins, Copyright="Copyright (C) 2021 Ultra Librarian. All rights reserved.", Digi-Key_Part_Number_1=S9014E-05-ND, Manufacturer_Part_Number=GRPB051VWVN-RC, RefDes=RefDes, Type=DEV
J15 J16: library part CMP-009-00061-1, Pins=2
J17: "Connector", Manufacturer_Name="JST (JAPAN SOLDERLESS TERMINALS)", Datasheet Link=http://www.jst-mfg.com/product/pdf/eng/eADH.pdf?5efba42839880, Height=1.9mm, Manufacturer_Part_Number=BM05B-ADHKS-GAN-ETB
L1 L2: library part CMP-0007-00005-1, "Semi-shielded Power Inductor, 4.7 uH, +/- 20%, 1.4 A, -40 to 125 degC, 3 x 3 x 1.5 mm SMD, RoHS and Halogen Free, Tape and Reel", Inductance="4.7 uH", Inductance Tolerance="+/- 20%", Manufacturer=Bourns, Operating Temperature="-40 to 125 degC", Rated current="1.4 A", Resistance to Solder Heat="+260 degC for 10 sec.", ComponentLink1Description="Manufacturer URL", ComponentLink1URL=http://www.bourns.com/, ComponentLink2Description=Datasheet, ComponentLink2URL=http://www.bourns.com/data/global/pdfs/SRN3015.pdf, ComponentLink3Description="Package Specification", ComponentLink3URL=http://www.bourns.com/data/global/pdfs/SRN3015.pdf, DatasheetVersion=Aug-11, DCR Max="0.136 Ohm", Isat="1.2 A", Mounting Technology="Surface Mount", PackageDescription="2-Pin SMD, Body 3 x 3 mm, Height 1.5 mm", PackageReference=SRN3015, Packing="Tape and Reel", PartNumber=SRN3015-4R7M, RoHS=TRUE, SRF Min="65 MHz"
LED1 LED2 LED3: library part LED, "Generic LED", Post-assembly job="Extend to a VSMY3850-GS08 with cables"
MD1: library part CMP-194065-000008-1, "RX TXRX MOD WIFI SURFACE MOUNT", Case/Package=SMD/SMT, Frequency=2.5GHz, Max Operating Temperature=85¢XC, Min Operating Temperature=-40¢XC, Operating Supply Voltage=3.6V, Package Quantity=550, Data Rate=150Mbps, Mount="Surface Mount", Packaging="Cut Tape", Sensitivity=-98dBm, Weight=0.088185oz
P1: library part CMP-002-00071-6, "Conn Spring Piston 6POS SMD"
P2: "Header, 2-Pin", LatestRevisionDate=17-Jul-2002, LatestRevisionNote="Re-released for DXP Platform.", Publisher="Altium Limited"
P3: library part "Header 3", "Header, 3-Pin", LatestRevisionDate=17-Jul-2002, LatestRevisionNote="Re-released for DXP Platform.", Publisher="Altium Limited"
Q1: library part MOSFET-N_BodyDiode, "N-channel MOSFET with body diode drawn"
R1 R2: library part CMP-2000-00180-1, Manufacturer=Panasonic, Part Number=ERJ-3EKF1001V
R7 R8 R9 R10 R11 R12 R13 R14 R15 R16 R17 R18 R19 R20 R21 R22 R23 R24 R25 R26 R27 R28 R29 R30: library part Resistor, "Generic Resistor"
SW1 SW2: library part CMP-2000-05903-2, "SWITCH TACTILE SPST-NO 0.05A 12V", Contact Current Rating=50mA, Contact Resistance=100mR, Max Operating Temperature=70¢XC, Max Voltage Rating (DC)=12V, Min Operating Temperature=-25¢XC, Operating Force=1.5N, Package Quantity=1, Ratings="Dust Proof", Actuator Length=0.4mm, Actuator Type=Standard, Contact Plating=Silver, Current Rating=50mA, Depth=4mm, Electrical Life=200000Cycles, Illumination Type=Non-Illuminated, Lead Free="Lead Free", Length=3.15mm, Max Current Rating=50mA, Mechanical Life=200000Cycles, Mount="Surface Mount", Orientation=Straight, Packaging="Tape and Reel", Switch Function=Off-Mom, Switch Travel=0.15mm, Termination=SMD/SMT, Throw Configuration=SPST, Voltage Rating (DC)=12V, Weight=0.022g
U1: library part CMP-0347-00032-2, "Boost Voltage Converter with 0.3 to 5.5 V Input and 5 V Output, -40 to 85 degC, 10-Pin SON (DRC), Green (RoHS & no Sb/Br)", Manufacturer="Texas Instruments", Switching Frequency(Max)(kHz)=1250, ComponentLink1Description=Datasheet, ComponentLink1URL=http://www.ti.com/general/docs/lit/getliterature.tsp?genericPartNumber=TPS61202&fileType=pdf, ComponentLink2Description="Package Specification", ComponentLink2URL=http://www.ti.com/litv/pdf/mpds117k, DatasheetVersion=SLVS577B, Eco-Plan="Green (RoHS & no Sb/Br)", Mounting Technology="Surface Mount", PackageDescription="10-Pin Plastic Small Outline No-Lead, 3 x 3 x 1 mm Body, 0.5 mm Pitch, Exposed Pad", PackageReference=DRC0010J, PackageVersion="revL, Sep-2011", PartNumber=TPS61202DRCT, Preset Vout(V)=5, Regulated Outputs(#)=1, SubFamily="Step-Up Regulator", Synchronous Rectification=TRUE, Topology=Boost, Vin(Max)(V)=5.5, Vin(Min)(V)=0.3, Vout(Max)(V)=5, Vout(Min)(V)=5
U2: library part CMP-0062-02170-2, "Micropower 50 mA Ultra Low-Dropout Regulator, 5-pin SOT-23, Pb-Free", Manufacturer="National Semiconductor", PackageTopMarking=L00A*XTT, PowerWise=N, ComponentLink1Description="LP2980 Datasheet", ComponentLink1URL=http://www.national.com/ds/LP/LP2980.pdf, ComponentLink2Description="LP2980 Web Page", ComponentLink2URL=http://www.national.com/pf/LP/LP2980.html, ComponentLink3Description="MF05A Package Page", ComponentLink3URL=http://www.national.com/packaging/folders/mf05a.html, CompType="LDO IC", DatasheetVersion=Sep-2006, PackageDescription="Molded SOT-23, .115 x .063 x .040 in Body, 5 Lead, .0375 in Pitch", PackageReference=MF05A, PackageVersion="revD, Aug-2008", PinCount=5, RevisionNote="Component URLs added", RoHS=Y
U3: library part CMP-0388-00648-2, "24-Channel, 12-Bit PWM LED Driver with Internal Oscillator, 3 to 5.5 V, -40 to 85 degC, 32-pin QFN (RHB32), Green (RoHS & no Sb/Br)", Manufacturer="Texas Instruments", Rating=Catalog, Code_JEDEC=MO-220, ComponentLink1Description="Manufacturer URL", ComponentLink1URL=http://www.ti.com/, ComponentLink2Description=Datasheet, ComponentLink2URL=http://www.ti.com/general/docs/lit/getliterature.tsp?genericPartNumber=TLC5947&fileType=pdf, ComponentLink3Description="Package Specification", ComponentLink3URL=http://www.ti.com/lit/ml/mpqf130c/mpqf130c.pdf, DatasheetVersion=SBVS114A, Eco-Plan="Green (RoHS & no Sb/Br)", Mounting Technology="Surface Mount", PackageDescription="32-Pin Plastic Flat Pack, Body 5 x 5 mm, Pitch 0.5 mm", PackageReference=RHB0032E, PackageVersion=4204326/D, PartNumber=TLC5947RHBT, SubFamily="LED Driver", Vin(Max)(V)=5.5, Vin(Min)(V)=3
U4: library part CMP-0343-00033-2, "Boost Voltage Converter with 0.3 to 5.5 V Input and 3.3 V Output, -40 to 85 degC, 10-Pin SON (DRC), Green (RoHS & no Sb/Br)", Manufacturer="Texas Instruments", Switching Frequency(Max)(kHz)=1250, ComponentLink1Description=Datasheet, ComponentLink1URL=http://www.ti.com/general/docs/lit/getliterature.tsp?genericPartNumber=TPS61201&fileType=pdf, ComponentLink2Description="Package Specification", ComponentLink2URL=http://www.ti.com/litv/pdf/mpds117k, DatasheetVersion=SLVS577B, Eco-Plan="Green (RoHS & no Sb/Br)", Mounting Technology="Surface Mount", PackageDescription="10-Pin Plastic Small Outline No-Lead, 3 x 3 x 1 mm Body, 0.5 mm Pitch, Exposed Pad", PackageReference=DRC0010J, PackageVersion="revL, Sep-2011", PartNumber=TPS61201DRCT, Preset Vout(V)=3.3, Regulated Outputs(#)=1, SubFamily="Step-Up Regulator", Synchronous Rectification=TRUE, Topology=Boost, Vin(Max)(V)=5.5, Vin(Min)(V)=0.3, Vout(Max)(V)=3.3, Vout(Min)(V)=3.3
J2 J4 J5 J6 J7 J8: LatestRevisionDate=17-Jul-2002, LatestRevisionNote="Re-released for DXP Platform.", Publisher="Altium Limited"

## Free pads (board coordinates)
  round 4.1 hole 2.1: 1(35,62) 2(11.617,21.5) 3(58.383,21.5)

## Via types
v1: diameter 0.6, hole 0.3, Top Layer to Bottom Layer, 220 vias
v2: diameter 0.5, hole 0.2, Top Layer to Bottom Layer, 19 vias

## Nets (pads, with @x,y where several pads share a name; then routed paths per layer and width w, separated by ;. In a path a pad name is that pad's centre, name@x,y a point inside that pad or via, vN(x,y) a via of type N, cw(c..) or ccw(c..) an arc to the next point about the centre after c; other vN are vias at no path point)
3V3: BAT.1 C2.2 C8.1 C9.2 C10.2 C11.2 C12.2 C13.2 C15.2 C16.2 C20.2 C21.2 C22.2 C23.2 C24.2 C25.2 C26.2 C27.2 C28.2 C29.2 C30.2 C31.2 C32.2 C33.2 C34.2 C35.2 C36.2 C37.2 C38.2 C40.2 IC1.8 IC1.26 IC1.39 IC1.54 IC1.60 IC2.1 IC2.6 IC2.14 J1.10 J9.5 J10.5 J11.5 J12.5 J13.5 J14.5 J17.4 LED1.1 LED2.1 LED3.1 MD1.2 R1.2 R2.2 R7.2 R8.2 R9.2 R11.2 R12.2 R13.2 R14.2 R18.2 R19.2 R29.2 R30.2 U2.1 U2.3 U3.28 U4.2 U4.10 | length 343.3
  Top Layer w0.25: v1(38.88,33.8) 38.862,33.782 38.862,33.728 39.34,33.25 IC1.60@44.1,33.25 ; IC1.54@44.1,36.25 45.284,36.25 45.847,35.687 v1(45.847,35.179) ; IC1.8@49.75,29.1 49.75,32.245 53.256,35.751 55.074,35.751 55.075,35.75 IC1.26@55.899,35.75 ; IC1.39@50.75,40.9 50.75,41.987 51.055,42.292 v1(58.674,42.291) ; IC1.26@55.9,35.75 56.798,35.75 56.799,35.751 58.522,35.751 59.055,36.284 v1(59.055,36.322) ; R11.2@58.166,39.331 58.491,39.006 58.531,39.006 59.094,38.443 59.094,36.361 v1(59.055,36.322) ; R11.2@58.204,39.331 58.459,39.586 58.459,40.513 R9.2@58.713,40.767 58.713,42.252 v1(58.674,42.291) ; J17.4@59.926,36.3 59.915,36.311 59.066,36.311 v1(59.055,36.322)
  Top Layer w0.254: U3.28@37.166,54.676 v1(39.41,54.675)
  Top Layer w0.28: 40.002,17.082 40.002,17.021 U4.2@41.087,17.021 ; U4.10@44.037,17.521 45.212,17.521
  Top Layer w0.508: J12.5@22.639,56.515 23.621,56.515 J11.5@25.653,58.548 ; v1(28.702,45.737) 28.702,48.768 29.971,50.037 v1(31.242,50.037) ; v1@31.225,49.801 31.242,49.784 R2.2@31.242,48.477 ; v1@38.035,52.894 36.322,51.181 34.427,51.181 v1(33.283,50.036) 35.059,48.26 40.494,48.26 R30.2@40.679,48.075 ; v1@39.4,41.783 39.4,45.457 R29.2@40.679,46.736 ; J9.5@41.402,56.134 44.908,56.134 v1(45.738,55.305) ; C40.2@45.621,21.209 C40.2@45.661,21.169
  Top Layer w0.6: v1(15.875,22.987) 15.893,23.005 15.893,24.111 R1.2@15.912,24.13 ; R1.2@16.01,24.482 MD1.2@16.01,26.5 16.01,36.33 v1(18.923,39.243) ; v1(35.814,21.209) 39.935,17.088 ; v1@35.839,21.209 C40.2@45.621,21.209 ; 45.212,17.521 45.661,17.97 C40.2@45.661,21.093 C40.2@45.661,21.169
  Top Layer w0.635: v1(29.464,11.557) BAT.1@29.464,13.774 29.464,14.859 v1(35.814,21.209)
  Top Layer w0.8: R29.2@40.679,46.736 R30.2@40.679,48.075
  Bottom Layer w0.254: J1.10@50.951,15.867 52.349,14.469 53.839,14.469 55.753,16.383 55.753,25.273 59.055,28.575 v1(59.055,36.322)
  Bottom Layer w0.5: IC2.6@39.4,40.676 v1@39.4,41.739 ; R13.2@46.863,35.218 46.843,35.198 45.866,35.198 v1(45.847,35.179) 44.468,33.8 IC2.14@40.49,33.8 v1(38.88,33.8) 38.88,36.141 36.291,38.731 35.4,38.731 IC2.1@35.4,40.165 35.4,41.496 35.746,41.842 39.284,41.842 39.343,41.783 v1(39.37,41.783) 40.894,40.259 47.752,40.259 48.522,39.489 48.522,38.561 R12.2@48.602,38.481
  Bottom Layer w0.508: C38.2@10.834,49.911 11.941,51.018 ; C36.2@12.631,51.093 12.631,51.018 11.941,51.018 ; J14.5@14.224,54.102 12.697,54.102 11.996,53.401 11.996,51.073 11.941,51.018 ; v1(15.875,22.987) 17.653,21.209 v1(35.814,21.209) ; C33.2@17.526,56.857 18.656,56.857 18.998,56.515 J13.5@19.177,56.515 ; J13.5@19.356,56.515 20.779,56.515 20.792,56.528 21.469,56.528 21.482,56.515 J12.5@22.639,56.515 ; U2.1@20.771,39.309 19.016,39.309 18.95,39.243 v1(18.923,39.243) ; U2.3@20.771,41.209 20.71,41.148 C8.1@18.971,41.148 18.923,41.1 v1(18.923,39.243) ; C31.2@20.955,51.601 22.519,50.037 28.448,50.037 ; U2.3@20.967,41.412 25.292,45.737 v1(28.702,45.737) ; R14.2@21.375,30.226 18.923,32.678 v1(18.923,39.243) ; C27.2@24.384,59.016 C27.2@24.511,59.016 25.641,59.016 25.856,58.801 J11.5@26.035,58.801 ; C32.2@25.8,51.874 C32.2@25.996,52.07 27.894,52.07 28.448,51.516 28.448,50.037 ; J11.5@26.172,58.801 27.207,57.766 27.363,57.766 C25.2@27.559,57.57 ; C25.2@27.363,57.512 27.421,57.57 C25.2@27.559,57.57 ; R8.2@28.575,11.645 28.645,11.575 29.446,11.575 v1(29.464,11.557) ; C28.2@30.099,56.3 30.099,57.101 ; C29.2@30.149,54.864 31.115,54.864 33.025,52.954 37.945,52.954 37.97,52.929 38.027,52.929 v1(38.052,52.911) 39.399,54.258 39.399,54.664 v1(39.41,54.675) 39.417,54.682 39.417,56.134 ; C28.2@30.149,56.134 30.149,55.06 C29.2@30.199,55.01 ; v1@31.217,50.037 28.448,50.037 ; v1@31.284,50.037 v1@33.282,50.037 ; J10.5@31.369,60.532 31.369,58.84 C23.2@30.099,57.57 29.025,57.57 28.967,57.512 28.909,57.57 C24.2@28.829,57.57 C25.2@27.559,57.57 ; C20.2@38.012,57.404 38.208,57.208 38.343,57.208 39.417,56.134 ; C20.2@38.012,57.531 C21.2@38.012,58.674 C22.2@38.012,59.944 ; J9.5@41.402,56.134 39.417,56.134 ; v1(45.738,55.305) 45.755,55.287 45.755,55.238 R18.2@47.244,53.749 ; R18.2@47.47,53.9 52.497,53.9 ; R7.2@49.657,44.997 C10.2@52.49,44.997 ; R19.2@51.015,51.054 52.49,51.054 ; C2.2@52.615,54.864 52.497,54.746 52.497,53.9 ; LED3.1@58.662,45.085 LED2.1@58.662,46.736 ; LED3.1@58.674,45.073 58.668,45.067 58.668,42.297 v1(58.674,42.291) 53.633,42.291 C9.2@52.49,43.434 52.49,44.316 52.497,44.323 52.49,44.33 C10.2@52.49,44.831 C10.2@52.49,44.997 ; LED2.1@58.674,46.748 58.662,46.76 58.662,48.363 LED1.1@58.674,48.375 ; C10.2@52.49,44.997 52.49,45.713 52.497,45.72 52.49,45.727 C11.2@52.49,46.228 52.49,47.11 52.497,47.117 52.49,47.124 C12.2@52.49,47.625 52.49,48.507 52.497,48.514 52.49,48.521 C13.2@52.49,49.022 52.49,49.904 52.497,49.911 52.49,49.918 C15.2@52.49,50.419 52.49,51.054 ; 52.49,51.054 52.49,51.301 52.497,51.308 52.49,51.315 C16.2@52.49,51.816 52.49,52.698 52.497,52.705 52.497,53.9
  Bottom Layer w0.58: J14.5@14.224,54.102 C34.2@15.66,54.102 ; C35.2@15.787,52.705 C35.2@15.787,52.832 ; C37.2@17.487,51.435 17.454,51.468 17.234,51.468 16.03,52.672 15.947,52.672 C35.2@15.787,52.832 ; C33.2@17.526,56.984 17.366,56.824 16.771,56.824 15.787,55.84 C34.2@15.787,53.975 C35.2@15.787,52.832
5V: C4.2 P3.1 U1.2 U1.10 | length 31.4
  Bottom Layer w0.28: 30.353,12.954 32.25,14.851 U1.2@32.639,14.851 ; U1.10@35.97,14.351 37.211,14.351 38.659,12.903 C4.2@38.659,11.811
  Bottom Layer w0.508: P3.1@16.256,13.97 16.434,13.97 17.45,12.954 30.353,12.954 32.131,11.176 38.278,11.176 C4.2@38.786,11.684